# Altium PCB Temp Sensirion assy FPC.PcbDoc
Units mm, origin at the board's own origin, x right, y up, seen from the top; angles counter-clockwise.
Board outline 15.5 x 31.04 mm, 2 copper layers (Top Layer, Bottom Layer), stack 0.371 mm thick; 2 components, 6 nets, 17 pads, 9 vias.
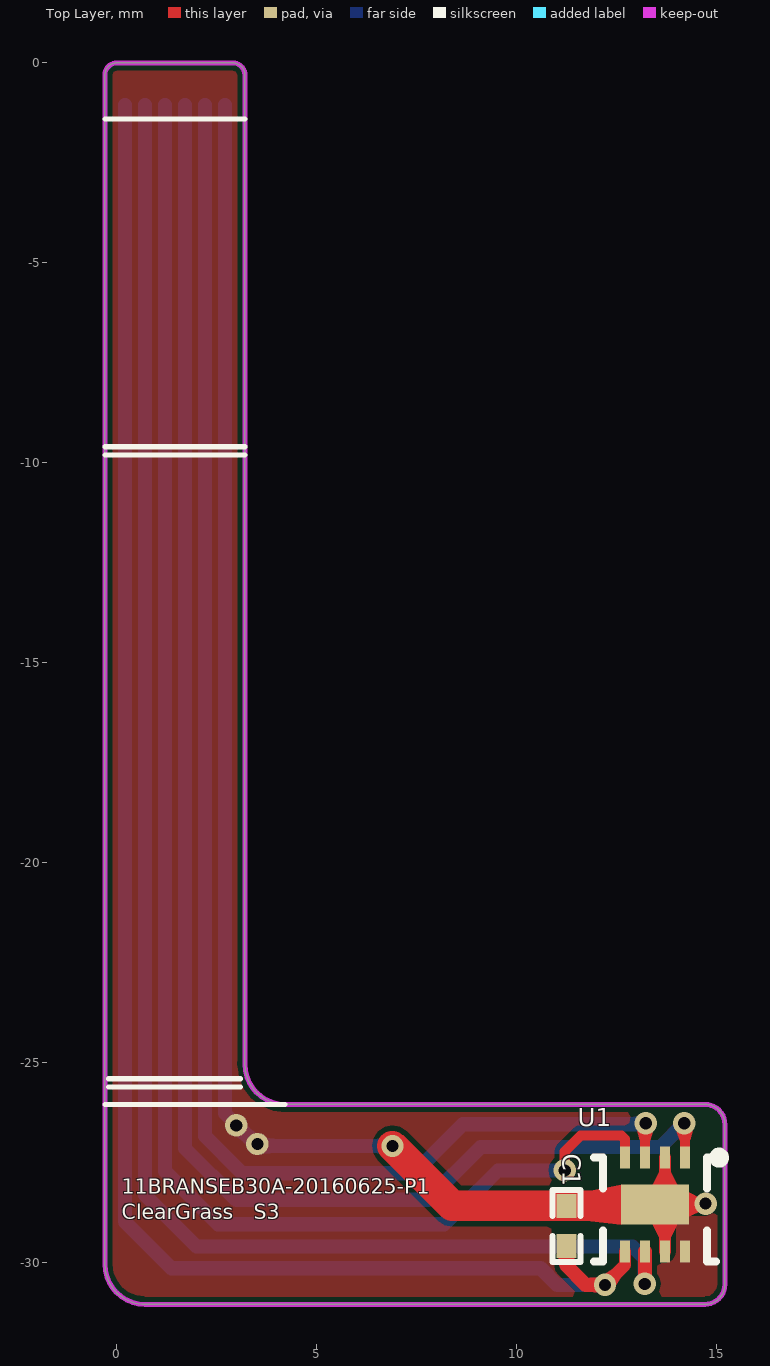
[diagram p0: Top Layer view]
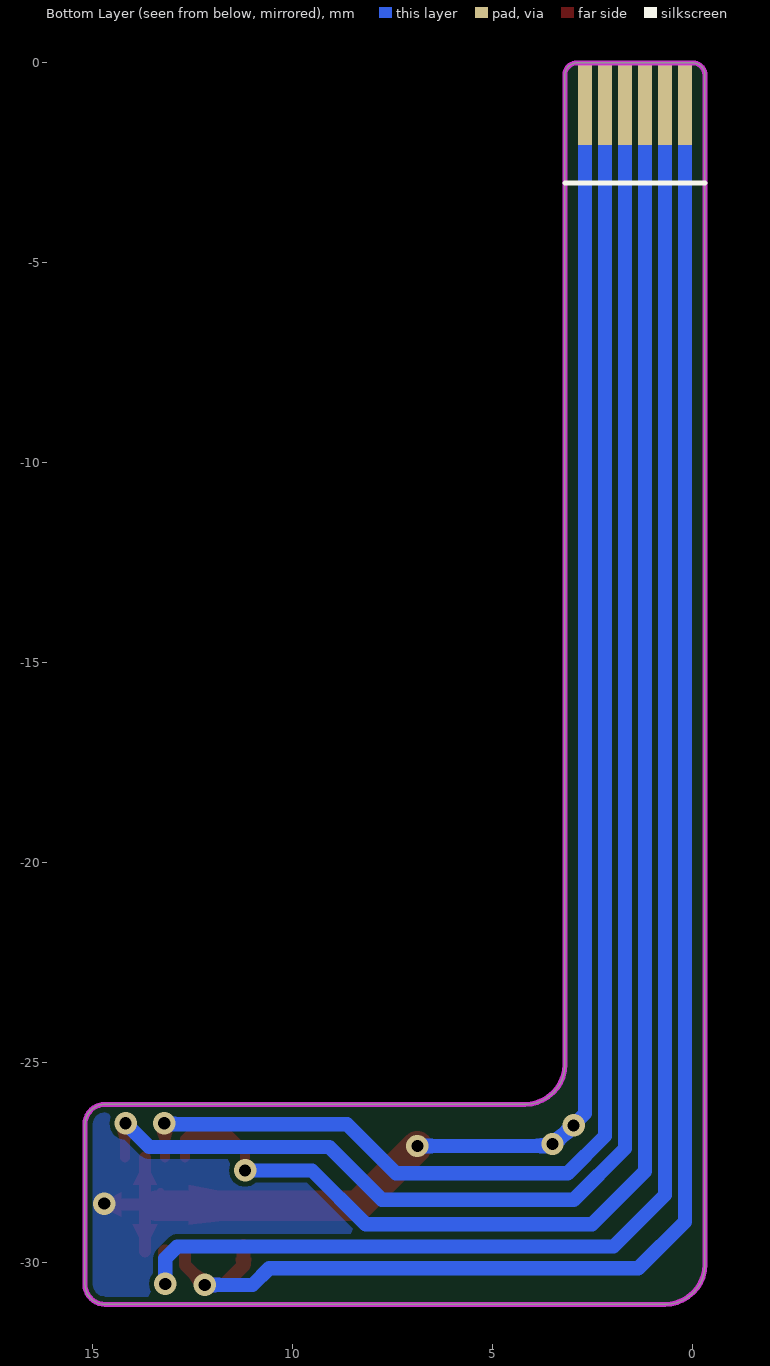
[diagram p1: Bottom Layer view, seen from below]

## Layer stack, top to bottom
Top Layer: signal copper 0.0356
Dielectric: core 0.3, FR-4, Dk 4.8
Bottom Layer: signal copper 0.0356

## Board outline
-0.3,-30.035 -0.3,-0.3 cw(c0,-0.3) 0,0 2.9,0 cw(c2.9,-0.3) 3.2,-0.3 3.2,-25.035 ccw(c4.2,-25.035) 4.2,-26.035 14.7,-26.035 cw(c14.7,-26.535) 15.2,-26.535 15.2,-30.535 cw(c14.7,-30.535) 14.7,-31.035 0.7,-31.035 cw(c0.7,-30.035)

## Design rules (kind name [scope] priority, off if disabled: settings)
Clearance Clearance_1 [All] p1: gap=0.127
Clearance [All] p2: gap=0.254
ComponentClearance [All] p1 off: gap=0.254 collisioncheckmode=3 verticalgap=0.254 showdistances=FALSE
FabricationTestPointUsage TestPointUsage [All] p1: valid=0 allowmultiple=FALSE
FabricationTestpoint Testpoint [All] p1: side=3 testpointundercomponent=TRUE minsize=1.016 maxsize=2.54 preferedsize=1.524 minholesize=0 maxholesize=1.016 preferedholesize=0.813 testpointgrid=0.025 allowsidetop=TRUE allowsidebottom=TRUE usegrid=TRUE gridtolerance=0
HoleToHoleClearance [All] p1 off: gap=0.254 allowstackedmicrovias=TRUE
MinimumSolderMaskSliver [All] p1 off: minsoldermaskwidth=0.254
PolygonConnect [All] p1: connectstyle=Direct reliefconductorwidth=0.254 reliefentries=4 polygonreliefangle="90 Angle"
RoutingVias [All] p1: holewidth=0.305 width=0.559 viastyle="Through Hole" minholewidth=0.305 minwidth=0.559 maxholewidth=0.711 maxwidth=1.27
SilkToSilkClearance [All] p1 off: silktosilkclearance=0.254
SilkscreenOverComponentPads [IsPad] p1 off: minsilkscreentomaskgap=0.254
SolderMaskExpansion [All] p1: expansion=0.102
Width [All] p1: maxlimit=0.762 minlimit=0.203 preferedwidth=0.254
21 further rules are at their usual default settings.

## Components (designator, comment, footprint, x,y, rotation, side; value= is the part's Value field where it differs from the comment)
C1 "0.1uF/10V" 0402C 11.238,-29.075 r90 top
U1 "SHT31" DFN 13.45,-28.542 r180 top locked

## Footprints (in the part's own frame and the unit in brackets; to place one, negate y for a bottom-side part, rotate by r counter-clockwise, add the part's x,y. Pads: shape width x height; smd on the part's side, far side on the other; paste and mask are expansions set on the pad)
0402C [mm]
  rect 0.6x0.5 smd: 1(-0.5,0) 2(0.5,0)
  silkscreen extent -0.9,-0.35 0.9,0.35, body extent -0.51,-0.25 0.51,0.25, height 0.5
DFN [mm]
  rect 0.25x0.55 smd: 1(-0.75,-1.175) 2(-0.25,-1.175) 3(0.25,-1.175) 4(0.75,-1.175) 5(0.75,1.175) 6(0.25,1.175) 7(-0.25,1.175) 8(-0.75,1.175)
  rect 1.7x1 smd: 9(0,0)
  silkscreen extent -1.73,-1.3 1.53,1.43, body extent -1.48,-1.55 1.51,1.55, height 1

## Part data
C1: library part CAP, "厂家"
U1: "厂家：盛思睿，型"

## Free pads (board coordinates)
  rect 0.35x2 smd far side: 1(0.2,-1.05) 2(0.7,-1.05) 3(1.2,-1.05) 4(1.7,-1.05) 5(2.2,-1.05) 6(2.7,-1.05)

## Via types
v1: diameter 0.559, hole 0.305, Top Layer to Bottom Layer, tented both sides, 9 vias

## Nets (pads, with @x,y where several pads share a name; then routed paths per layer and width w, separated by ;. In a path a pad name is that pad's centre, name@x,y a point inside that pad or via, vN(x,y) a via of type N, cw(c..) or ccw(c..) an arc to the next point about the centre after c; other vN are vias at no path point)
3.3V: C1.1 pad.1 U1.5 | length 43.3
  Top Layer w0.305: v1(12.203,-30.548) 12.7,-30.051 U1.5
  Top Layer w0.356: C1.1 11.238,-30.066 11.72,-30.548 v1(12.203,-30.548)
  Bottom Layer w0.356: pad.1 0.2,-28.969 1.365,-30.134 10.595,-30.134 11.009,-30.548 v1(12.203,-30.548)
ALERT: pad.5 U1.3 | length 38.5
  Top Layer w0.254: U1.3 v1@13.2,-26.528
  Bottom Layer w0.356: pad.5 2.2,-26.829 3.129,-27.758 7.426,-27.758 8.649,-26.535 v1@13.193,-26.535
  other v1: 13.219,-26.51
GND: C1.2 pad.6 U1.2 U1.7 U1.8 U1.9 | length 40.6
  Top Layer w0.254: U1.9@13.01,-28.55 U1.9@13.31,-28.25
  Top Layer w0.305: U1.7 U1.9@13.7,-28.575 ; U1.2 13.7,-28.542 v1@14.691,-28.542
  Top Layer w0.762: v1(6.888,-27.076) 8.387,-28.575 C1.2 U1.9@13.417,-28.575
  Bottom Layer w0.356: pad.6 2.7,-26.262 3.515,-27.076 v1(6.888,-27.076)
  other v1: 14.717,-28.516 3.51,-27.026 2.983,-26.56
NRESET: pad.2 U1.6 | length 41.8
  Top Layer w0.356: v1@13.2,-30.516 U1.6
  Bottom Layer w0.356: pad.2 0.7,-28.3 1.986,-29.586 12.892,-29.586 13.193,-29.888 v1(13.193,-30.523)
T_SCL: pad.3 U1.4 | length 40.4
  Top Layer w0.254: v1(11.195,-27.686) 11.195,-27.213 11.593,-26.814 12.609,-26.814 12.7,-26.905 U1.4
  Bottom Layer w0.356: pad.3 1.2,-27.708 2.524,-29.032 8.179,-29.032 9.525,-27.686 v1(11.195,-27.686)
T_SDA: pad.4 U1.1 | length 40.7
  Top Layer w0.254: U1.1 v1@14.2,-26.526
  Bottom Layer w0.356: pad.4 1.7,-27.141 2.981,-28.423 7.773,-28.423 9.093,-27.102 13.592,-27.102 v1(14.184,-26.51)

## Polygon pours and split planes (outlines as drawn)
GND on Top Layer "TOP-No Net 1" (solid, remove dead copper, pour order 16): -2.656,1.1 4.278,1.1 4.456,1.278 4.126,0.948 4.126,-24.351 15.708,-24.351 16.216,-24.859 16.597,-25.24 16.597,-33.393 -1.716,-33.393 -2.809,-32.301
GND on Bottom Layer "TOP-No Net 1" (solid, remove dead copper, pour order 18): -1.259,0.618 -1.107,0.77 4.354,0.77 4.354,-24.63 4.075,-24.909 4.456,-24.528 16.343,-24.528 16.343,-33.622 15.784,-34.18 15.556,-34.409 -1.767,-34.409

## Keep-outs
Keep-Out Layer:
  the board outline again, w0.127

## Silkscreen, mask and mechanical layers (free items; w line width, h text height)
Top Overlay:
  lines w0.127: -0.3,-26.035 4.2,-26.035 ; -0.3,-9.802 3.2,-9.802 ; -0.3,-9.594 3.2,-9.594 ; -0.3,-1.4 3.2,-1.4 ; -0.216,-25.599 3.086,-25.599 ; -0.216,-25.395 3.086,-25.395
  text "11BRANSEB30A-20160625-P1" at 0.124,-28.398 h0.64
  text "ClearGrass" at 0.124,-29.033 h0.64
  text "S3" at 3.426,-29.033 h0.64
Bottom Overlay:
  lines w0.127: -0.3,-3 3.2,-3